# Altium PCB RF_AMPL_001.PcbDoc (part 1 of 2)
Units mm, origin at the board's own origin, x right, y up, seen from the top; angles counter-clockwise.
Board outline 150 x 92 mm, 2 copper layers (TOP, BOT), stack 1.1 mm thick; 102 components, 48 nets, 245 pads, 883 vias.
Unrouted connection lines stored in the file: 56.
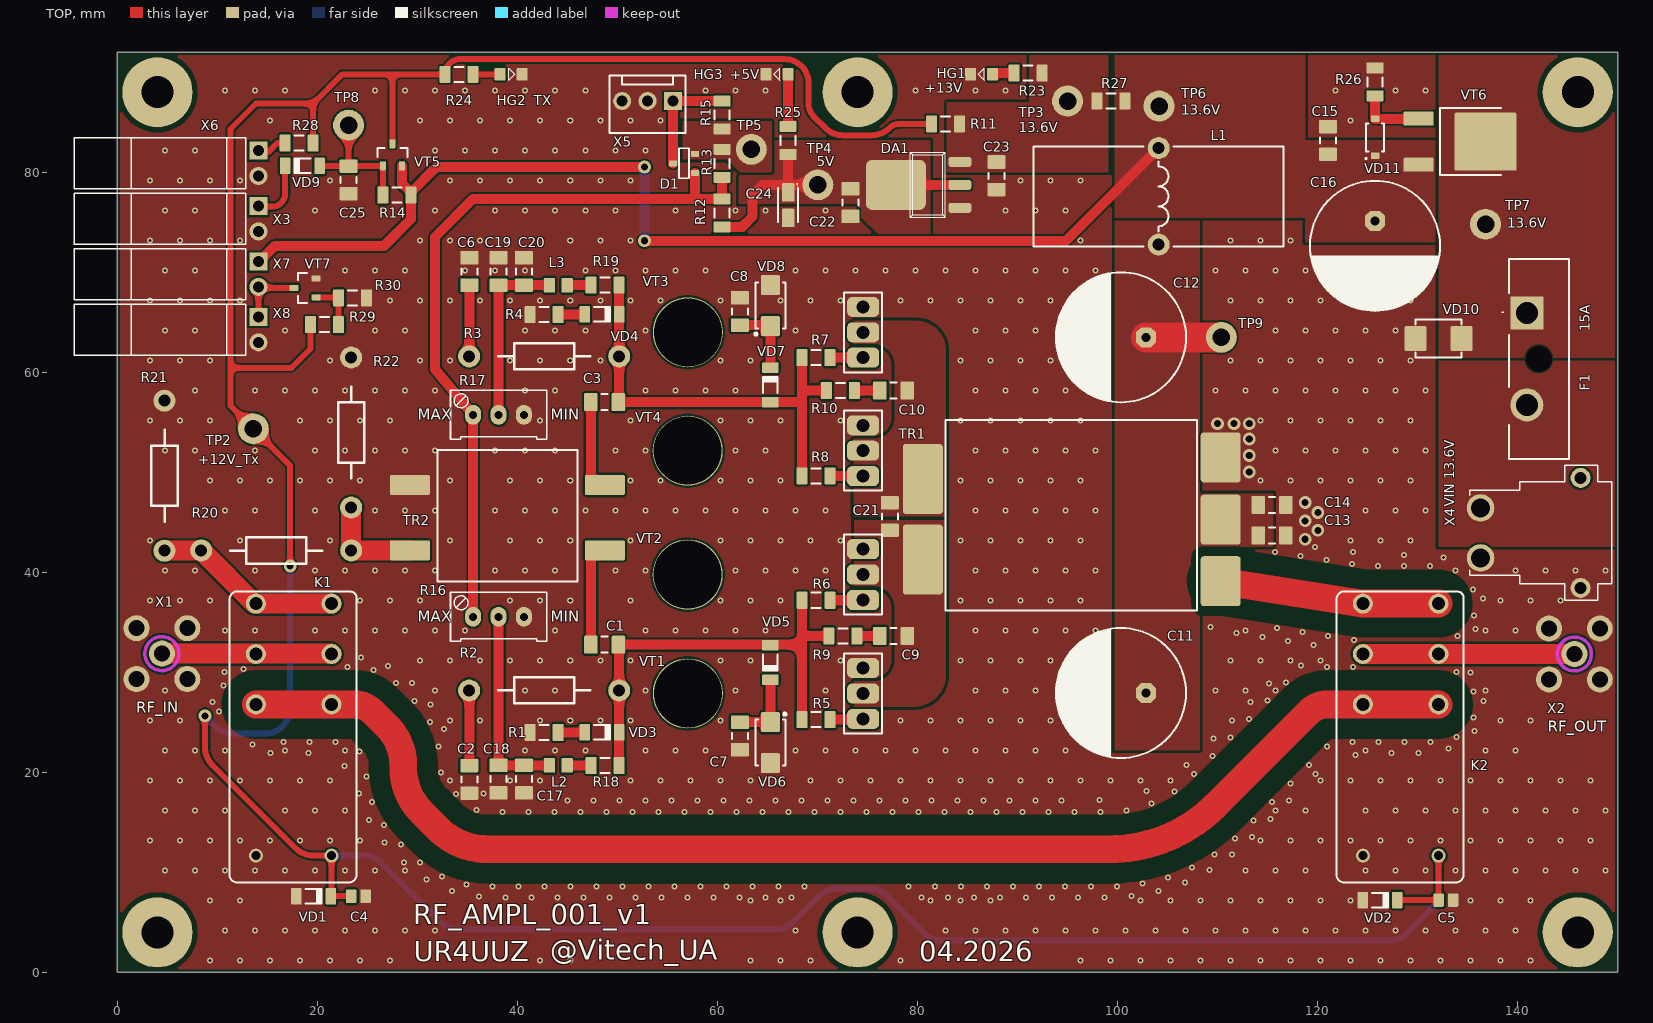
[diagram p0: TOP view]
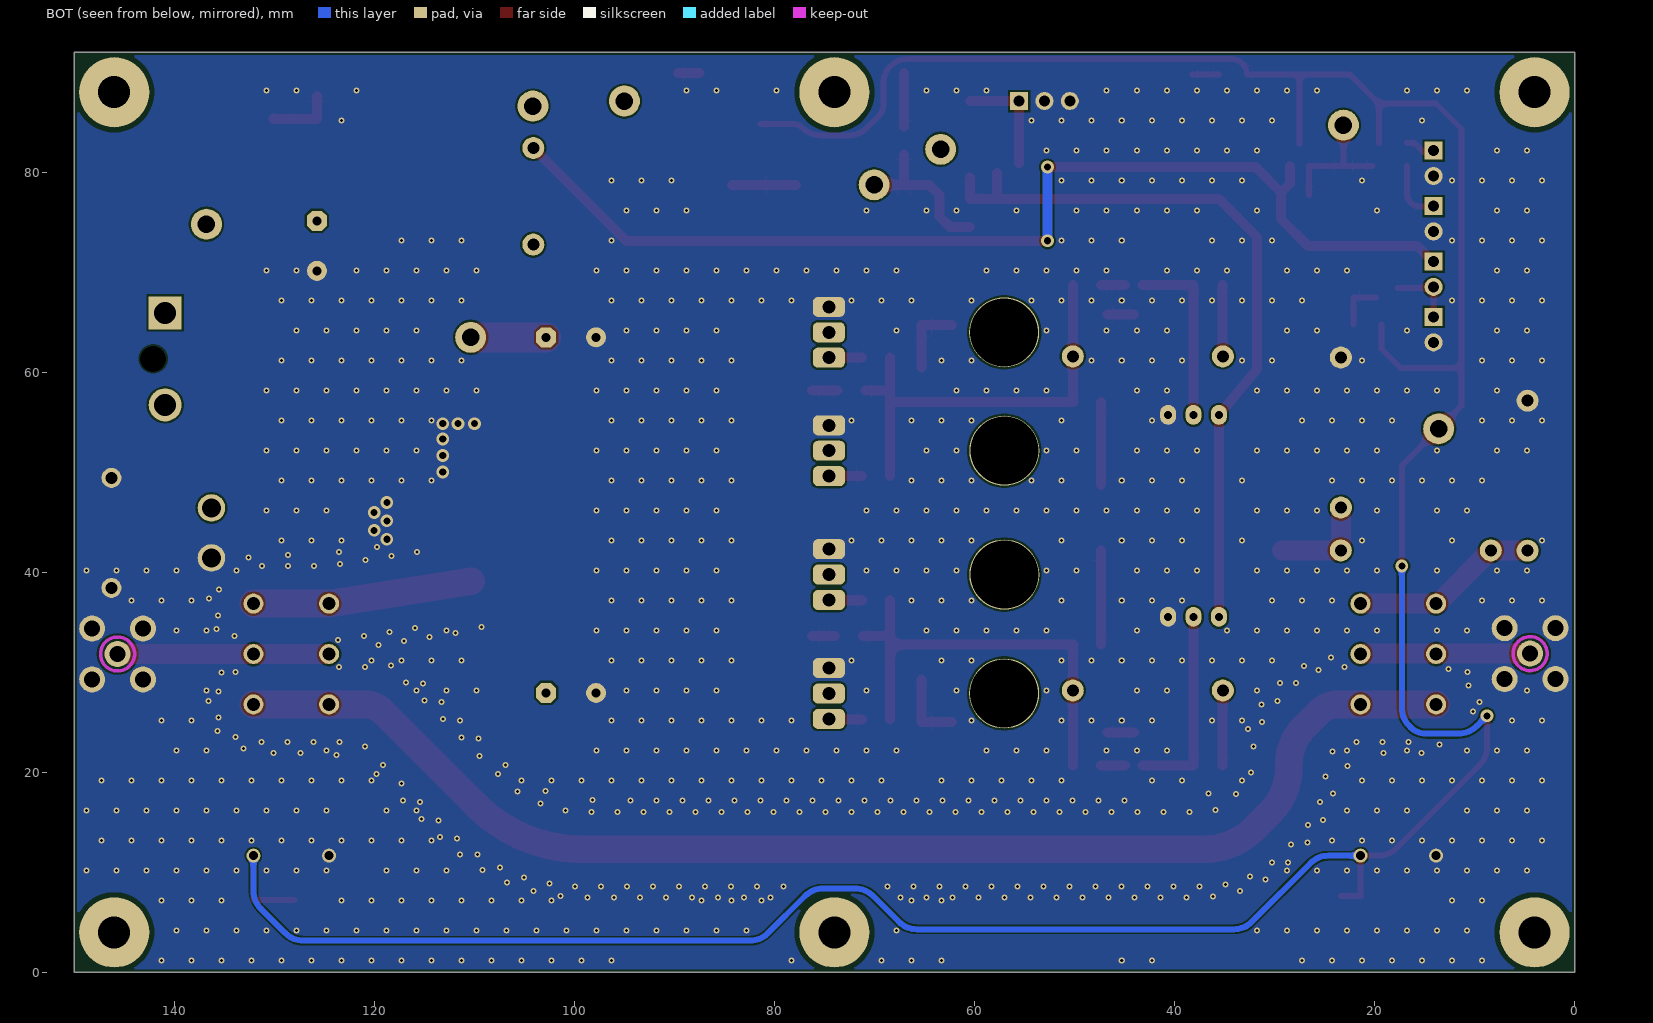
[diagram p1: BOT view, seen from below]
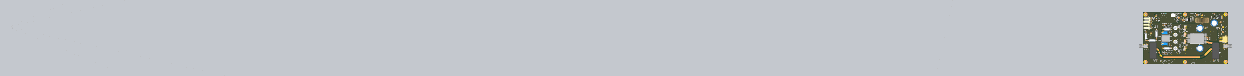
[diagram p3: 3D render of the assembled board from above, using the file's embedded part models]

## Layer stack, top to bottom
Top Solder: solder mask 0.012, Solder Resist, Dk 3.5
TOP: signal copper 0.035
Dielectric 1: core 1.03, FR-4, Dk 4.5
BOT: signal copper 0.035
Bottom Solder: solder mask 0.012, Solder Resist, Dk 3.5

## Board outline
0,0 0,92 150,92 150,0

## Design rules (kind name [scope] priority, off if disabled: settings)
BoardOutlineClearance BoardOutlineClearance_1 [OnLayer('Top Overlay')] p1: gap=0 ignorepadtopadclearanceinfootprint=FALSE
BoardOutlineClearance [All] p2: gap=0.3 ignorepadtopadclearanceinfootprint=FALSE
Clearance Clearance_CPW [InNetClass('CPW') vs OnLayer('TOP')] p1: gap=2.03 ignorepadtopadclearanceinfootprint=FALSE except(0.3: Arc-THPad Track-THPad SMDPad-SMDPad SMDPad-THPad THPad-Fill THPad-Poly THPad-Region; 1: SMDPad-Fill SMDPad-Poly SMDPad-Region)
Clearance MiddleVoltage [InNetClass('MiddleVoltage')] p2: gap=0.5 ignorepadtopadclearanceinfootprint=FALSE except(0: Arc-Hole Track-Hole SMDPad-Hole THPad-Hole Via-Hole Fill-Hole Poly-Hole Region-Hole Text-Hole; 0.2: Arc-Text Track-Text SMDPad-Text THPad-Text Via-Text Fill-Text Poly-Text Region-Text Text-Text)
Clearance HighVoltage [InNetClass('HighVoltage')] p3: gap=1 ignorepadtopadclearanceinfootprint=FALSE except(0: Arc-Hole Track-Hole SMDPad-Hole THPad-Hole Via-Hole Fill-Hole Poly-Hole Region-Hole Text-Hole; 0.2: Arc-Text Track-Text SMDPad-Text THPad-Text Via-Text Fill-Text Poly-Text Region-Text Text-Text)
Clearance Standart [All] p4: gap=0.15 ignorepadtopadclearanceinfootprint=FALSE except(0.1: THPad-Via; 0.2: Arc-Arc Arc-Track Arc-SMDPad Arc-THPad Arc-Via Arc-Fill Arc-Poly Arc-Region Track-Track Track-SMDPad Track-THPad Track-Via Track-Fill Track-Poly Track-Region SMDPad-Via SMDPad-Poly THPad-Poly Via-Poly Poly-Region Region-Region; 0.3: Arc-Hole Track-Hole Fill-Fill Fill-Poly Fill-Region Poly-Poly)
ComponentClearance [All] p1: gap=0.1 collisioncheckmode=3 verticalgap=0.1 showdistances=TRUE
Height [All] p1: minheight=0 maxheight=40 prefheight=12.7
HoleSize [All] p1: absolutevalues=TRUE maxlimit=12 minlimit=0.2 maxpercent=80.000 minpercent=20.000
HoleToHoleClearance [All] p1: gap=0.15 allowstackedmicrovias=TRUE
MinimumSolderMaskSliver [All] p1: minsoldermaskwidth=0.1
NetAntennae [All] p1: netantennaetolerance=2
PlaneClearance [All] p1: clearance=0.3
PlaneConnect PlaneConnectMiddleCurrent [InNetClass('MiddleCurrent')] p1: planeconnectstyle=Relief reliefexpansion=0.508 reliefentries=4 reliefconductorwidth=0.5 reliefairgap=0.3
PlaneConnect PlaneHighCurrent [InNetClass('HighCurrent')] p2: planeconnectstyle=Relief reliefexpansion=0.508 reliefentries=4 reliefconductorwidth=0.5 reliefairgap=0.35
PlaneConnect [All] p3: planeconnectstyle=Relief reliefexpansion=0.508 reliefentries=4 reliefconductorwidth=0.3 reliefairgap=0.3
PolygonConnect PolygonConnectMiddleCurrent [All vs InNetClass('MiddleCurrent')] p1: connectstyle=Relief reliefconductorwidth=0.4 reliefentries=4 polygonreliefangle="90 Angle" airgapwidth=0.3
PolygonConnect PolygonHighCurrent [InNetClass('HighCurrent')] p2: connectstyle=Relief reliefconductorwidth=0.5 reliefentries=4 polygonreliefangle="90 Angle" airgapwidth=0.3
PolygonConnect PolygonConnect_Keepout [(ObjectKind = 'Track') And (Layer = 'KeepOutLayer')] p3: connectstyle=Direct reliefconductorwidth=0.254 reliefentries=4 polygonreliefangle="90 Angle" airgapwidth=0.254
PolygonConnect PolygonConnect_Via [IsVia] p4: connectstyle=Direct reliefconductorwidth=0.254 reliefentries=4 polygonreliefangle="90 Angle" airgapwidth=0.254
PolygonConnect [All] p5: connectstyle=Direct reliefconductorwidth=0.6 reliefentries=4 polygonreliefangle="90 Angle" airgapwidth=0.2
RoomDefinition RF_AMPL_001 [InComponentClass('RF_AMPL_001')] p1: confinementstyle=ConfineIn formatcopy=TRUE lockcomponents=FALSE outline -797.727,-745.82 -746.927,-745.82 -746.927,-720.42 -797.727,-720.42
RoutingCorners [All] p1: cornerstyle=45-Degree minsetback=1 maxsetback=3
RoutingVias Power [InNetClass('Power')] p1: holewidth=0.8 width=1.5 viastyle="Through Hole" minholewidth=0.5 minwidth=1 maxholewidth=1.2 maxwidth=3
RoutingVias [All] p2: holewidth=0.4 width=0.8 viastyle="Through Hole" minholewidth=0.2 minwidth=0.4 maxholewidth=1 maxwidth=2
SilkToSilkClearance [All] p1: silktosilkclearance=0
SilkToSolderMaskClearance [IsVia vs IsText And OnTopSilkscreen] p1: minsilkscreentomaskgap=0.2 clearancetoexposedcopper=TRUE
SolderMaskExpansion SolderMaskExpansion_VIA [IsVia] p1: expansion=-3 istentingtop=TRUE useseparateexpansions=TRUE expansionbottom=-3 istentingbottom=TRUE
SolderMaskExpansion [All] p2: expansion=0.05 istentingtop=FALSE
SupplyNets "Schematic Supply Nets_5" [InNet('GND')] p1: voltage=0.000
SupplyNets "Schematic Supply Nets_4" [InNet('BIAS_A')] p2: voltage=0.000
SupplyNets "Schematic Supply Nets_3" [InNet('BIAS_B')] p3: voltage=0.000
SupplyNets "Schematic Supply Nets_2" [InNet('+12V_IN')] p4: voltage=0.000
SupplyNets "Schematic Supply Nets_1" [InNet('+12V_TX')] p5: voltage=0.000
SupplyNets "Schematic Supply Nets" [InNet('+5V')] p6: voltage=0.000
Width Width_CPW [InNetClass('CPW')] p1: maxlimit=2.77 minlimit=2.77 preferedwidth=2.77
Width Width_1 [All] p2: maxlimit=3 minlimit=0.2 preferedwidth=0.2
Width WidthMiddleCurrent [InNetClass('MiddleCurrent')] p3: maxlimit=2 minlimit=0.35 preferedwidth=0.5
Width WidthHighCurrent [InNetClass('HighCurrent')] p4: maxlimit=5 minlimit=0.5 preferedwidth=1
19 further rules are at their usual default settings.

## Classes and differential pairs
net class CPW: NetK1_3 NetK2_7

## Components (designator, comment, footprint, x,y, rotation, side; value= is the part's Value field where it differs from the comment)
C1 "0.1" C_CERAMIC_1206_MED 48.717,32.766 r0 top
C2 "0.1" C_CERAMIC_1206_MED 35.179,19.304 r90 top
C3 "0.1" C_CERAMIC_1206_MED 48.717,57.023 r0 top
C4 "18pF" C_CERAMIC_0805_HI 24.093,7.62 r180 top value=0.1мкФ
C5 "18pF" C_CERAMIC_0805_HI 132.805,7.239 r180 top value=0.1мкФ
C6 "0.1" C_CERAMIC_1206_MED 35.179,70.082 r270 top
C7 "0.1" C_CERAMIC_1206_MED 62.23,23.644 r90 top
C8 "0.1" C_CERAMIC_1206_MED 62.23,66.092 r270 top
C9 "0.1" C_CERAMIC_1206_MED 77.597,33.655 r180 top value=4700
C10 "0.1" C_CERAMIC_1206_MED 77.597,58.166 r180 top value=4700
C11 "Aluminium capacitor, 2200мкФ, 25V, ±20%, 54mOhm, 14x10x5 mm, -55...+105°C" "CAP: D13C5H20" 100.33,27.94 r180 top value=2200мкФ
C12 "Aluminium capacitor, 2200мкФ, 25V, ±20%, 54mOhm, 14x10x5 mm, -55...+105°C" "CAP: D13C5H20" 100.33,63.5 r180 top value=2200мкФ
C13 "0.1" C_CERAMIC_1206_MED 115.421,43.688 r180 top
C14 "0.1" C_CERAMIC_1206_MED 115.421,46.736 r180 top
C15 "0.1" C_CERAMIC_1206_MED 121.031,83.185 r270 top
C16 "Aluminium capacitor, 2200мкФ, 25V, ±20%, 54mOhm, 14x10x5 mm, -55...+105°C" "CAP: D13C5H20" 125.73,72.644 r270 top value=2200мкФ
C17 "100" C_CERAMIC_1206_MED 40.64,19.326 r270 top
C18 "0.1" C_CERAMIC_1206_MED 38.1,19.326 r270 top
C19 "100" C_CERAMIC_1206_MED 38.1,70.082 r90 top
C20 "0.1" C_CERAMIC_1206_MED 40.64,70.082 r90 top
C21 "100" C_CERAMIC_1206_MED 77.216,45.593 r270 top
C22 "0.1" C_CERAMIC_1206_MED 73.279,76.962 r270 top
C23 "0.1" C_CERAMIC_1206_MED 87.884,79.651 r270 top
C24 "10uF" C_TANTAL_CASE_A_MED 67.056,76.703 r270 top
C25 "0.1" C_CERAMIC_1206_MED 23.114,79.248 r270 top
D1 "Part Number" SOT23-3_300X250X110 56.642,80.899 r180 top
DA1 "LD1117S50TR" SOT-223 81.026,78.74 r90 top
F1 "STANDART_FUSE_HOLDER" 17861640001 140.913,65.941 r270 top
HG1 "LTST-C171GKT" LTST-C171GKT 86.403,89.789 r180 top
HG2 "LTST-C171GKT" LTST-C171GKT 39.37,89.789 r0 top
HG3 "LTST-C171GKT" LTST-C171GKT 65.956,89.789 r180 top
K1 "HF115F/012-2ZS4" HF115Fxxx-1(2)Zx3(4) 17.623,24.277 r90 top
K2 "HF115F/012-2ZS4" HF115Fxxx-1(2)Zx3(4) 128.3,24.277 r90 top
L1 "Fixed inductor, 10μH, ±20%, R22.9/14/7.62, Kool Mu, µ=125, 90 нГн/витков2" "IND: R22.9/14/7.62 (H)" 104.085,77.597 r270 top value=10μH
L2 "1uH" LQM21PNxxxxGRx_MED 44.073,20.701 r180 top
L3 "1uH" LQM21PNxxxxGRx_MED 44.073,68.707 r180 top
R1 "1кОм" R_ANY_CHIP_1206_MED 42.669,24.003 r180 top
R2 "27" FKN2WS-Series 42.665,28.194 r180 top
R3 "27" FKN2WS-Series 42.665,61.595 r180 top
R4 "1кОм" R_ANY_CHIP_1206_MED 42.669,65.786 r180 top
R5 "2.2" R_ANY_CHIP_1206_MED 69.847,25.273 r0 top
R6 "2.2" R_ANY_CHIP_1206_MED 69.847,37.211 r0 top
R7 "2.2" R_ANY_CHIP_1206_MED 69.847,61.468 r0 top
R8 "2.2" R_ANY_CHIP_1206_MED 69.847,49.657 r0 top
R9 "750" R_ANY_CHIP_1206_MED 72.517,33.655 r0 top
R10 "750" R_ANY_CHIP_1206_MED 72.273,58.181 r0 top
R11 "NF" R_ANY_CHIP_1206_MED 82.801,84.836 r180 top
R12 "10k" R_ANY_CHIP_1206_MED 60.452,75.943 r90 top
R13 "10k" R_ANY_CHIP_1206_MED 60.452,80.899 r270 top
R14 "10k" R_ANY_CHIP_1206_MED 27.943,77.724 r0 top
R15 "10k" R_ANY_CHIP_1206_MED 60.452,85.728 r270 top
R16 "10k" 3296W-1-xxx 38.1,35.56 r270 top
R17 "10k" 3296W-1-xxx 38.1,55.753 r270 top
R18 "15" R_ANY_CHIP_1206_MED 48.765,20.701 r0 top
R19 "15" R_ANY_CHIP_1206_MED 48.765,68.707 r0 top
R20 "68" FKN2WS-Series 15.875,42.196 r0 top
R21 "100" FKN2WS-Series 4.699,49.664 r90 top
R22 "100" FKN2WS-Series 23.368,53.982 r90 top
R23 "750" R_ANY_CHIP_1206_MED 91.059,89.916 r0 top
R24 "750" R_ANY_CHIP_1206_MED 34.16,89.789 r0 top
R25 "750" R_ANY_CHIP_1206_MED 67.056,83.188 r270 top
R26 "1кОм" R_ANY_CHIP_1206_MED 125.73,89.03 r90 top
R27 "0" R_ANY_CHIP_1206_MED 99.314,87.122 r180 top
R28 "750" R_ANY_CHIP_1206_MED 18.164,82.931 r180 top
R29 "750" R_ANY_CHIP_1206_MED 20.698,64.77 r0 top
R30 "10k" R_ANY_CHIP_1206_MED 23.498,67.437 r180 top
TP2 "PAD-1.75mm" PAD-1.75mm 13.589,54.356 r0 top
TP3 "PAD-1.75mm" PAD-1.75mm 94.996,87.122 r0 top
TP4 "PAD-1.75mm" PAD-1.75mm 70.026,78.74 r0 top
TP5 "PAD-1.75mm" PAD-1.75mm 63.373,82.296 r0 top
TP6 "PAD-1.75mm" PAD-1.75mm 104.14,86.614 r0 top
TP7 "PAD-1.75mm" PAD-1.75mm 136.779,74.803 r0 top
TP8 "PAD-1.75mm" PAD-1.75mm 23.114,84.709 r0 top
TP9 "PAD-1.75mm" PAD-1.75mm 110.363,63.5 r0 top
TR1 "TR" AMIDON_43-3312 95.348,45.307 r0 top
TR2 "TR" AMIDON_43-202 38.989,45.466 r0 top
VD1 "LL4148" SOD-80C_MED 19.611,7.62 r180 top
VD2 "LL4148" SOD-80C_MED 126.238,7.239 r180 top
VD3 "LL4148" SOD-80C_MED 48.44,24.003 r180 top
VD4 "LL4148" SOD-80C_MED 48.44,65.786 r180 top
VD5 "LL4148" SOD-80C_MED 65.278,30.988 r90 top
VD6 "SMAJ15CA" SMA_MED 65.278,22.969 r270 top
VD7 "LL4148" SOD-80C_MED 65.278,58.748 r270 top
VD8 "SMAJ15CA" SMA_MED 65.278,66.675 r90 top
VD9 "LL4148" SOD-80C_MED 18.489,80.645 r0 top
VD10 "SM6T18A" SMB-Bi1_MED 132.08,63.373 r0 top
VD11 "MMSZ5248BT1G" SOD-123_MED 125.73,83.494 r90 top
VT1 "IRLZ24N" TO220(H) 74.556,27.889 r90 top locked
VT2 "IRLZ24N" TO220(H) 74.549,39.78 r90 top locked
VT3 "IRLZ24N" TO220(H) 74.556,64 r90 top locked
VT4 "IRLZ24N" TO220(H) 74.549,52.159 r90 top locked
VT5 "BC807-40" SOT-23_MED 27.493,81.745 r270 top
VT6 "AOD403" DPAK_REC 135.279,83.058 r270 top
VT7 "IRLML0100TR" SOT-23_MED 18.753,68.453 r0 top
X1 "WSD-SMAKWE-14.5" KLS1-SMA002 4.445,31.877 r0 top
X2 "WSD-SMAKWE-14.5" KLS1-SMA002 145.669,31.837 r180 top
X3 "WH-02R" WF-2R 14.097,75.353 r90 top
X4 "XT30PW-M" XT30PW-M 144.78,43.942 r180 top
X5 "WH-03S" WF-3S 55.542,87.122 r180 top
X6 "WH-02R" WF-2R 14.097,80.899 r90 top
X7 "WH-02R" WF-2R 14.097,69.808 r90 top
X8 "WH-02R" WF-2R 14.097,64.262 r90 top

## Footprints (in the part's own frame and the unit in brackets; to place one, negate y for a bottom-side part, rotate by r counter-clockwise, add the part's x,y. Pads: shape width x height; smd on the part's side, far side on the other; paste and mask are expansions set on the pad)
3296W-1-xxx [mm] "Square Trimpot Trimming Potentiometer"
  oval 2x1.6 hole 0.8 mask+0.05: 1(0,-2.54) 2(0,0) 3(0,2.54)
  silkscreen extent -2.45,-4.8 2.45,4.8, body extent -2.45,-4.76 2.38,4.76, height 11.6
17861640001 [mm] "Automotive Fuse holder THT-Mount"
  rect 3.3x3.3 hole 2.2: 1(0,0)
  round 3.3 hole 2.2: 2(9.2,0)
  round 1.3 hole 2.6 unplated: MH1(4.6,1.2)
  silkscreen extent -5.4,-2.51 14.6,4.2, body extent -5.51,-1.78 14.64,4.22, height 17.65
AMIDON_43-202 [mm]
  rrect15% 4x2 smd mask+0.05: 1(-9.75,3.27) 2(9.75,3.27) 3(-9.75,-3.27) 4(9.75,-3.27)
  silkscreen extent -6.99,-6.38 6.98,6.76, body extent -7,-6.35 7,6.75, height 7.75
AMIDON_43-3312 [mm]
  rrect15% 4x5 smd mask+0.05: 1(14.957,6.188) 2(14.957,-6.191) 4(14.957,-0.04)
  rrect15% 4x7 smd mask+0.05: 3(-14.83,-4.032) 5(-14.83,4.032)
  silkscreen extent -12.57,-9.14 12.57,9.91, body extent -12.63,-9.12 12.57,9.88, height 9.75
C_CERAMIC_0805_HI [mm] "Chip Capacitor, 2-Leads, Body 2,00x1,25mm, IPC High Density"
  rrect15% 1.05x1.35 smd mask+0.05: 1(-0.725,0) 2(0.725,0)
  TOP pour cut-out: -0.05,0.65 0.05,0.65 0.05,-0.65 -0.05,-0.65
  body extent -1.1,-0.72 1.1,0.73, height 1.35
C_CERAMIC_1206_MED [mm] "Chip Capacitor, 2-Leads, Body 3,20x1,60mm, IPC Medium Density"
  rrect15% 1.35x1.8 smd mask+0.05: 1(-1.375,0) 2(1.375,0)
  silkscreen extent -0.3,-0.8 0.3,0.8, body extent -1.7,-0.9 1.7,0.9, height 1.8
C_TANTAL_CASE_A_MED [mm] "Molded Capacitor, 2-Leads, Body 3,20x1,60mm, IPC Medium Density"
  rrect15% 1.85x1.25 smd: 1(-1.275,0) 2(1.275,0)
  silkscreen extent -2.15,-1 1.7,1, body extent -1.92,-0.9 1.92,0.9, height 1.8
"CAP: D13C5H20" [mm]
  oct 2x2 hole 0.9: 1(-2.5,0)
  round 2 hole 0.9: 2(2.5,0)
  silkscreen extent -6.5,-6.5 6.5,6.5, body extent -6.5,-6.5 6.5,6.5, height 25
DPAK_REC [mm]
  rrect15% 1.4x3 smd mask+0.05: 1(-2.3,-5.2) 3(2.3,-5.2)
  rrect5% 5.8x6.2 smd paste-3.1 mask+0.05: 2(0,1.5)
  silkscreen extent -3.35,-3.05 3.35,3.05, body extent -3.35,-5.85 3.35,4.25, height 2.4
FKN2WS-Series [mm]
  round 2.2 hole 1.2 mask+0.05: 1(-7.5,0) 2(7.5,0)
  silkscreen extent -4.59,-1.33 4.59,1.3, body extent -7.9,-2.55 7.9,2.55, height 4.85
HF115Fxxx-1(2)Zx3(4) [mm] "Miniature High Power Relay"
  round 1.4 hole 0.9: 1(-12.6,3.78) 2(-12.6,-3.78)
  round 2 hole 1.3: 3(2.52,3.78) 4(2.52,-3.78) 5(7.56,3.78) 6(7.56,-3.78) 7(12.6,3.78) 8(12.6,-3.78)
  silkscreen extent -15.29,-6.3 13.82,6.41, body extent -15.17,-6.35 13.83,6.35, height 15.7
"IND: R22.9/14/7.62 (H)" [mm]
  round 2.2 hole 1.2: 1(-4.83,0.015) 2(4.83,0.015)
  silkscreen extent -5,-12.5 5,12.5, body extent -4.83,-12.47 4.83,12.47, height 24.77
KLS1-SMA002 [mm] "SMA Connector, Right Angle"
  round 2.6 hole 1.6 mask+0.05: 1(0,0) 2(-2.54,-2.54) 2(-2.54,2.54) 2(2.54,-2.54) 2(2.54,2.54)
  TOP pour cut-out: -1.9,0 -1.755,-0.727 -1.344,-1.344 -0.727,-1.755 0,-1.9 0,-1.9 0.727,-1.755 1.344,-1.344 1.755,-0.727 1.9,0 1.9,0 1.755,0.727 1.344,1.344 0.727,1.755 0,1.9 0,1.9 -0.727,1.755 -1.344,1.344 -1.755,0.727 -1.9,0
  TOP keep-out circle w0.35: c0,0 r1.7
  BOT pour cut-out: -1.9,0 -1.755,-0.727 -1.344,-1.344 -0.727,-1.755 0,-1.9 0,-1.9 0.727,-1.755 1.344,-1.344 1.755,-0.727 1.9,0 1.9,0 1.755,0.727 1.344,1.344 0.727,1.755 0,1.9 0,1.9 -0.727,1.755 -1.344,1.344 -1.755,0.727 -1.9,0
  BOT keep-out circle w0.35: c0,0 r1.7
  body extent -11.58,-3.2 3.28,3.15, height 9.57
LQM21PNxxxxGRx_MED [mm] "Chip Inductor, 2-Leads, Body 2,00x1,25mm, IPC Medium Density"
  rrect15% 1.13x1.47 smd: 1(-0.885,0) 2(0.885,0)
  body extent -1.07,-0.7 1.08,0.7, height 1
LTST-C171GKT [mm]
  rrect15% 1.1x1.25 smd mask+0.05: AN(-1.1,0) CA(1.1,0)
  silkscreen extent -0.25,-0.6 0.35,0.6, body extent -1.05,-0.67 1.05,0.68, height 0.9
PAD-1.75mm [mm]
  round 3.1 hole 1.75: 1(0,0)
R_ANY_CHIP_1206_MED [mm] "Chip Resistor, 2-Leads, Body 3,10x1,60mm, IPC Medium Density"
  rrect15% 1.1x1.7 smd: 1(-1.4,0) 2(1.4,0)
  silkscreen extent -0.45,-0.75 0.45,0.75, body extent -1.6,-0.85 1.6,0.85, height 0.65
SMA_MED [mm] "Molded Diode, 2-Leads, Body 4,30x2,61mm, IPC Medium Density"
  rrect15% 2x1.9 smd mask+0.05: AN(2.05,0) CA(-2.05,0)
  silkscreen extent -2.97,-1.5 2.3,1.58, body extent -2.52,-1.46 2.52,1.46, height 2.44
SMB-Bi1_MED [mm] "Molded Diode, 2-Leads, Body 5,60x3,95mm, IPC Medium Density"
  rrect15% 2.2x2.5 smd mask+0.05: AN1(-2.3,0) AN2(2.3,0)
  silkscreen extent -2.3,-1.9 2.3,1.9, body extent -2.8,-1.95 2.8,1.95, height 2.65
SOD-80C_MED [mm] "MELF Diode, 2-Leads, Body 3,50x1,45mm, IPC Medium Density"
  rrect15% 1.05x1.65 smd mask+0.05: AN(1.725,0) CA(-1.725,0)
  silkscreen extent -0.8,-0.73 0.8,0.72, body extent -1.75,-0.72 1.75,0.72, height 1.45
SOD-123_MED [mm] "SOD-123, 2-Leads, Body 1,60x3,71mm, IPC Medium Density"
  rrect15% 0.65x0.85 smd mask+0.05: AN(1.85,0) CA(-1.85,0)
  silkscreen extent -2.2,-0.9 1.4,0.97, body extent -1.95,-0.9 1.95,0.9, height 1.18
SOT23-3_300X250X110 [mm] "SOT23, 3-Leads, Body 2,90x2,45mm, Pitch 0,90mm, IPC Low Density"
  rrect30% 0.8x0.6 smd paste-0.05 mask+0.05: 1(-1.1,0.95) 2(-1.1,-0.95) 3(1.1,0)
  silkscreen extent -0.5,-1.5 0.5,1.5, body extent -1.25,-1.5 1.25,1.5, height 1.1
SOT-23_MED [mm] "SOT23, 3-Leads, Body 2,92x2,37mm, Pitch 0,95mm, IPC Medium Density"
  rrect15% 0.9x0.6 smd mask+0.05: 1(1.1,-0.95) 2(1.1,0.95) 3(-1.1,0)
  silkscreen extent -0.7,-1.5 0.2,1.5, body extent -1.25,-1.5 1.25,1.5, height 1.1
SOT-223 [mm]
  rrect50% 1x2.3 smd mask+0.05: 1(-2.3,-3.2) 2(0,-3.2) 3(2.3,-3.2)
  rrect25% 5x6 smd mask+0.05: 4(0,3.2)
  silkscreen extent -3.22,-1.75 3.28,1.75, body extent -3.25,-3.48 3.25,3.48, height 1.68
TO220(H) [mm]
  rrect50% 2x3.2 hole 1.3: 1(-2.54,0) 2(0,0) 3(2.54,0)
  silkscreen extent -4,-1.9 4,1.9, body extent -4.95,-0.37 4.95,20.67, height 2.76
WF-2R [mm]
  rect 1.8x1.8 hole 1.1: 1(1.27,0)
  round 1.8 hole 1.1: 2(-1.27,0)
  silkscreen extent -2.54,1.27 2.54,18.41, body extent -2.54,-0.33 2.54,13.5, height 5.8
WF-3S [mm] "Connector; Header; 3 Position"
  rect 1.8x1.8 hole 1.1: 1(0,0)
  round 1.8 hole 1.1: 2(2.54,0) 3(5.08,0)
  silkscreen extent -1.27,-2.54 6.35,3.2, body extent -1.25,-2.6 6.25,3.2, height 11.62
XT30PW-M [mm]
  round 2.75 hole 1.9: 1(8.5,2.5) 2(8.5,-2.5)
  round 2 hole 1.2: MP(-1.5,5.5) MP(-1.5,-5.5)
  silkscreen extent -4.6,-6.75 9.6,6.75, body extent -4.5,-6.65 9.45,6.65, height 5.05

## Part data
C1 C3 C17 C18 C19 C20 C21 C25: library part 1206B102K102CG, "1nF 1000V X7R ±10% 1206 Ceramic Capacitor RoHS", Dielectric Type=X7R, Manufacturer=Walsin, Package=1206, Supplier Part Number 1=791-1206B102K102CT, Temperature Range="-55°C ~ 125°C", Tolerance=±10%, Voltage=1000V, Component Status=Released, Component Type=SMD, ComponentLink1Description=Datasheet, ComponentLink1URL=https://eu.mouser.com/datasheet/2/210/Middle_and_High_Voltage_DS-1535659.pdf, Part Number=1206B102K102CG, Part Type="Ceramic / X7R / 1206", Price=0, Replacement=NONE, Standard Lead Time="31 Weeks", Supplier 1=Mouser
C2 C6 C7 C8 C13 C14 C15 C22 C23: library part 1206B102K102CG, "1nF 1000V X7R ±10% 1206 Ceramic Capacitor RoHS", Dielectric Type=X7R, Manufacturer=Walsin, Package=1206, Supplier Part Number 1=791-1206B102K102CT, Temperature Range="-55°C ~ 125°C", Tolerance=±10%, Voltage=100V, Component Status=Released, Component Type=SMD, ComponentLink1Description=Datasheet, ComponentLink1URL=https://eu.mouser.com/datasheet/2/210/Middle_and_High_Voltage_DS-1535659.pdf, Part Number=1206B102K102CG, Part Type="Ceramic / X7R / 1206", Price=0, Replacement=NONE, Standard Lead Time="31 Weeks", Supplier 1=Mouser
C4 C5: library part CERAMIC_0805, Dielectric Type=C0G/NP0, Manufacturer=Hitano, Package=0805, Part Number=**, Temperature Range="-55°C ~ 125°C", Tolerance=±5%, Voltage=50V, Component Status=Released, Component Type=SMD, ComponentLink1Description=Datasheet, ComponentLink1URL=\\altiumdb.ajax.local\files\Datasheet\Capacitor\Hitano-MLCC.pdf, GUID_1C=32087c8a-96b8-11ea-ab61-0050569f2651, Part Type="Ceramic / C0G(NP0) / 0402", Price=0, Replacement=NONE
C9 C10: library part 1206B102K102CG, "1nF 1000V X7R ±10% 1206 Ceramic Capacitor RoHS", Dielectric Type=X7R, Manufacturer=Walsin, Package=1206, Part Number=12065A472JAT2A, Supplier Part Number 1=791-1206B102K102CT, Temperature Range="-55°C ~ 125°C", Tolerance=±10%, Voltage=50V, Component Status=Released, Component Type=SMD, ComponentLink1Description=Datasheet, ComponentLink1URL=https://eu.mouser.com/datasheet/2/210/Middle_and_High_Voltage_DS-1535659.pdf, Part Type="Ceramic / X7R / 1206", Price=0, Replacement=NONE, Standard Lead Time="31 Weeks", Supplier 1=Mouser
C11 C12 C16: library part Aluminium, Manufacturer=Wurth, Package="14x10x5 mm", PartNumber=860080475013, Temperature=-55...+105°C, Tolerance=±20%, TypeCapacitor="Aluminium capacitor", Voltage=25V, HelpURL=https://www.digikey.com/product-detail/en/wurth-electronics-inc/860080475013/732-9029-1-ND/5728972, Impedance=54mOhm, ValueManufacturerPartNumber="Aluminium capacitor, 2200мкФ, 25V, ±20%, 54mOhm, 14x10x5 mm, -55...+105°C"
C24: library part 293D106X9010A2TE3, "10uF 10V ±10% Case A Tantalum Capacitor RoHS, 3.4Ohm", Dielectric Type=NONE, Manufacturer=Vishay, Package="Case A", Supplier Part Number 1=74-293D106X9010A2TE3, Temperature Range="-55°C ~ 125°C", Tolerance=±10%, Voltage=10V, Component Status=Released, Component Type=SMD, ComponentLink1Description=Datasheet, ComponentLink1URL=https://eu.mouser.com/datasheet/2/427/293d-1763499.pdf, Part Number=293D106X9010A2TE3, Part Type=Tantalum, Price=0.2178, Replacement=NONE, Standard Lead Time="20 Weeks", Supplier 1=Mouser
D1: library part TL431IDBZ, "Precision Programmable Reference SOT23-3", Manufacturer="Texas Instruments", Max Operating Temperature=+85°C, Min Operating Temperature=-40°C, Package=SOT23-3, Component Function="Voltage Reference", ComponentLink1Description="Datasheet Link", Mount=SMT, Name="TL431IDBZ [Texas Instruments]", Number of Pins=4, Part Number=TL431IDBZ, Type=Мікросхема
DA1: "Adjustable and fixed low drop positive voltage regulator, 5V 800mA, 1.25V to 15V Vin", Manufacturer=STMicroelectronics, Package=SOT-223, Supplier Part Number 1=497-6447-2-ND, Temperature Range="0°C ~ 125°C", Component Status=Released, Component Type=SMD, ComponentLink1Description=Datasheet, ComponentLink1URL=https://www.st.com/content/ccc/resource/technical/document/datasheet/99/3b/7d/91/91/51/4b/be/CD00000544.pdf/files/CD00000544.pdf/jcr:content/translations/en.CD00000544.pdf, Part Number=LD1117S50TR, Part Type="Power / Linear Regulator", Price=0.66, Replacement=NONE, Standard Lead Time="14 Weeks", Supplier 1=Digi-Key
F1: "Automotive Fuse holder THT-Mount", Current=15A, Manufacturer_Name=LITTELFUSE, Manufacturer_Part_Number=17861640001, Datasheet Link=https://www.littelfuse.com/media?resourcetype=2d-prints&itemid=dcb90cf3-0771-4ccd-8726-26101cf00574&filename=ol-178.6164.0000(c), Height=17.5mm
HG1 HG2 HG3: "Low Power LED, Green 565nm, Clear, SMD 0805, Vf 2.1V - 2.6V, 5 ~ 12mcd @ 20 mA, 130°", Color=Green, Manufacturer="Lite-On Optoelectronics", Package=0805, Supplier Part Number 1=160-1423-2-ND, Temperature Range="-55°C ~ 85°C", Component Status=Released, Component Type=SMD, ComponentLink1Description=Datasheet, GUID_1C=df39881f-c399-11eb-ab74-0050569f2651, Part Number=LTST-C171GKT, Part Type="LED / 0805", Price=0.06, Replacement=NONE, Supplier 1=Digi-Key, Wavelength=565nm
K1 K2: "Miniature High Power Relay, DPDT (2 Form C), 12VDC 400mW Coil, 5.0mm 2 Pole 8A AgCdO", Manufacturer=Hongfa, Temperature Range="-40°C ~ 85°C", Ajax_1C_ID=38428, Ajax_1C_PN="HF115F/012-2ZS4 HONGFA, Реле", Ajax_1С_Status="RND Only", Component Status=Released, Component Type=PTH, ComponentLink1Description=Datasheet, ComponentLink1URL=https://www.tme.eu/Document/2962d862af219292e2e76bbc4b5ef3a2/hf115f.pdf, GUID_1C=4ba44618-64be-11ec-a90c-00505699469b, Part Number=HF115F/012-2ZS4, Part Type=Relay, Price=2.27649268, Replacement=NONE, Supplier 1=TME, Supplier Part Number 1=HF115F/012-2ZS4
L1: library part Inductor_R22.9/14/7.62, Manufacturer=Magnetics, Package=R22.9/14/7.62, PartNumber=0077310A7, Tolerance=±20%, TypeInductor="Fixed inductor", ValueManufacturerPartNumber="Fixed inductor, 10μH, ±20%, R22.9/14/7.62, Kool Mu, µ=125, 90 нГн/витков2", AL="90 нГн/витков2", HelpURL=http://ferrite.ru/warehouse/r-22-9147-62-77310-a7.html, MaterialPermeability=µ=125, TypeMatiriel="Kool Mu"
L2 L3: library part LQM21PN1R0MGHL, "1uH Shielded Multilayer Inductor 1.7A 100mOhm Max, 0805", Current=1.7A, Manufacturer="Murata Electronics", Package=0805, Saturation Current=1.5A, Supplier Part Number 1=81-LQM21PN1R0MGHL, Temperature Range="-40°C ~ 85°C", Tolerance=±20%, Component Status=Released, Component Type=SMD, ComponentLink1Description=Datasheet, ComponentLink1URL=https://eu.mouser.com/datasheet/2/281/1/JELF243B_0040-1699501.pdf, Part Number=LQM21PN1R0MGHL, Part Type="Power / Multilayer", Price=NONE, Replacement=NONE, Standard Lead Time="10 Weeks", Supplier 1=Mouser
R1 R4 R9 R10 R18 R19 R23 R24 R25 R26 R28 R29: library part RC1206FR-071RL, "1 Ohms ±1%, 1/4W 1206 Thick Film Resistor", Manufacturer=Yageo, Package=1206, Power Rating=0.25W, Supplier Part Number 1=311-1.00FRTR-ND, Temperature Range="-55°C ~ 155°C", Temperature Stability=±200ppm/°C, Tolerance=±1%, Voltage=200V, Ajax_1C_ID=11059, Ajax_1C_PN="1R 1% 1206 Resistors SMD RoHS", Ajax_1С_Status="RND Only", Component Status=Released, Component Type=SMD, ComponentLink1Description=Datasheet, ComponentLink1URL=https://eu.mouser.com/datasheet/2/447/PYu_RC_Group_51_RoHS_L_11-1984063.pdf, GUID_1C=50ee7b76-bfc7-11e7-8199-14dda9d2d04d, Part Number=RC1206FR-071RL, Part Type="Thick Film", Price=0,0027, Replacement=NONE, Supplier 1=Digi-Key
R2 R3: library part FKN2WSJT-73-22R, "22 Ohm ±5%, 2W d4.6mm L11.5mm Axial Through Hole, Fusible, Flameproof, Wirewound Resistor", Manufacturer=Yageo, Package="Axial 4.6mm, L11.5mm", Power Rating=2W, Supplier Part Number 1=603-FKN2WSJT-73-22R, Temperature Range="-40°C ~ 155°C", Temperature Stability=±350ppm/°C, Tolerance=±5%, Ajax_1C_ID=55873, Ajax_1C_PN="22R 5% 2W FKN2WSJT-73-22R YAGEO резистор выводной", Ajax_1С_Status="RND Only", Component Status=Released, Component Type=PTH, ComponentLink1Description=Datasheet, ComponentLink1URL=https://www.yageo.com/upload/media/product/productsearch/datasheet/lr/YAGEO%20FKN_datasheet_2021v0.pdf, GUID_1C=1e7de5d6-6f01-11ed-a366-005056994834, Part Number=FKN2WSJT-73-22R, Part Type=Wirewound, Price=0,2524, Replacement=NONE, Supplier 1=Mouser
R5 R6 R7 R8: library part RC1206FR-072R4L, "2.42Ohms ±1%, 1/4W 1206 Thick Film Resistor", Manufacturer=Yageo, Package=1206, Power Rating=0.25W, Supplier Part Number 1=603-RC1206FR-072R4L, Temperature Range="-55°C ~ 155°C", Temperature Stability=±200ppm/°C, Tolerance=±1%, Voltage=200V, Ajax_1C_ID=17368, Ajax_1C_PN="2.4R 1% 1206 1/4W Resistors SMD RoHS", Ajax_1С_Status="Mass Production", Component Status=Released, Component Type=SMD, ComponentLink1Description=Datasheet, ComponentLink1URL=https://eu.mouser.com/datasheet/2/447/Yageo_03_18_2021_PYu_RC_Group_51_RoHS_L_11-2199992.pdf, GUID_1C=fdd97e3f-df6d-11e9-ab58-0050569f2651, Part Number=RC1206FR-072R4L, Part Type="Thick Film", Price=0,0021, Replacement=NONE, Supplier 1=Mouser
R11 R27: library part RC1206JR-070RL, "0 Ohms Jumper, 1/4W 1206 Thick Film Resistor", Manufacturer=Yageo, Package=1206, Power Rating=0.25W, Supplier Part Number 1=311-0.0ERTR-ND, Temperature Range="-55°C ~ 155°C", Temperature Stability=NONE, Tolerance=±5%, Voltage=200V, Ajax_1C_ID=5515, Ajax_1C_PN="0R 5% 1206 Resistors SMD RoHS", Ajax_1С_Status="Mass Production", Component Status=Released, Component Type=SMD, ComponentLink1Description=Datasheet, ComponentLink1URL=https://eu.mouser.com/datasheet/2/447/PYu_RC_Group_51_RoHS_L_10-1664068.pdf, GUID_1C=96b6e750-6b2e-11e4-9c1d-a45d36c4a9e5, Part Number=RC1206JR-070RL, Part Type="Thick Film", Price=0,0018, Replacement=NONE, Supplier 1=Digi-Key
R12 R13 R14 R15 R30: library part RC1206JR-0710KL, "10 kOhms ±5% 1/4W 1206 Thick Film Resistor", Manufacturer=Yageo, Package=1206, Power Rating=0.25W, Supplier Part Number 1=311-10KERTR-ND, Temperature Range="-55°C ~ 155°C", Temperature Stability=±100ppm/°C, Tolerance=±5%, Voltage=200V, Ajax_1C_ID=29423, Ajax_1C_PN="10k 5% 1206 Resistors SMD RoHS", Ajax_1С_Status="RND Only", Component Status=Released, Component Type=SMD, ComponentLink1Description=Datasheet, ComponentLink1URL=https://eu.mouser.com/datasheet/2/447/PYu_RC_Group_51_RoHS_L_11-1984063.pdf, GUID_1C=e3e7c694-a8f0-11eb-ab74-0050569f2651, Part Number=RC1206JR-0710KL, Part Type="Thick Film", Price=0,0018, Replacement=NONE, Supplier 1=Digi-Key
R16 R17: library part 3296W-1-103LF, "10 kOhms ±10% Trimmer Resistor, 0.5W, Through Hole 3/8\", 4.83x9.53mm, 10.03mm Height", Manufacturer=Bourns, Package=4.83x9.53mm, Power Rating=0.5W, Supplier Part Number 1=652-3296W-1-103LF, Temperature Range="-55°C ~ 125°C", Temperature Stability=±100ppm/°C, Tolerance=±10%, Ajax_1C_PN=NONE, Ajax_1С_Status="RND Only", Component Status="On Review", Component Type=PTH, ComponentLink1Description=Datasheet, ComponentLink1URL=https://www.bourns.com/data/global/pdfs/3296.pdf, Part Number=3296W-1-103LF, Part Type="Trimming Potentiometer", Price=NONE, Replacement=NONE, Supplier 1=Mouser
R20: library part FKN2WSJT-73-22R, "68 Ohm ±5%, 2W d4.6mm L11.5mm Axial Through Hole, Fusible, Flameproof, Wirewound Resistor", Manufacturer=Yageo, Package="Axial 4.6mm, L11.5mm", Power Rating=2W, Supplier Part Number 1=603-FKN2WSJT-73-22R, Temperature Range="-40°C ~ 155°C", Temperature Stability=±350ppm/°C, Tolerance=±5%, Ajax_1C_ID=55873, Ajax_1C_PN="22R 5% 2W FKN2WSJT-73-22R YAGEO резистор выводной", Ajax_1С_Status="RND Only", Component Status=Released, Component Type=PTH, ComponentLink1Description=Datasheet, ComponentLink1URL=https://www.yageo.com/upload/media/product/productsearch/datasheet/lr/YAGEO%20FKN_datasheet_2021v0.pdf, GUID_1C=1e7de5d6-6f01-11ed-a366-005056994834, Part Number=FKN2WSJT-73-22R, Part Type=Wirewound, Price=0,2524, Replacement=NONE, Supplier 1=Mouser
R21 R22: library part FKN2WSJT-73-22R, "100 Ohm ±5%, 2W d4.6mm L11.5mm Axial Through Hole, Fusible, Flameproof, Wirewound Resistor", Manufacturer=Yageo, Package="Axial 4.6mm, L11.5mm", Power Rating=2W, Supplier Part Number 1=603-FKN2WSJT-73-22R, Temperature Range="-40°C ~ 155°C", Temperature Stability=±350ppm/°C, Tolerance=±5%, Ajax_1C_ID=55873, Ajax_1C_PN="22R 5% 2W FKN2WSJT-73-22R YAGEO резистор выводной", Ajax_1С_Status="RND Only", Component Status=Released, Component Type=PTH, ComponentLink1Description=Datasheet, ComponentLink1URL=https://www.yageo.com/upload/media/product/productsearch/datasheet/lr/YAGEO%20FKN_datasheet_2021v0.pdf, GUID_1C=1e7de5d6-6f01-11ed-a366-005056994834, Part Number=FKN2WSJT-73-22R, Part Type=Wirewound, Price=0,2524, Replacement=NONE, Supplier 1=Mouser
TP2 TP3 TP4 TP5 TP6 TP7 TP8 TP9: "1.75mm Pad for Plug-In or Receptacle", Manufacturer=NONE, Ajax_1C_PN=NONE, Ajax_1С_Status="RND Only", Component Status=Released, Component Type=PTH, ComponentLink1Description=Datasheet, ComponentLink1URL=NONE, Part Number=PAD-1.75mm, Part Type=Pad, Price=NONE, Replacement=NONE, Temperature Range=NONE
TR1: library part Amidon_43-3312, Manufacturer=Handmade, Part Number="Amidon 43-3312", Saturation Current=11.3A, Tolerance=±20%, ComponentLink1Description=Datasheet, ComponentLink1URL=https://www.vishay.com/docs/34193/ihlp-4040dz-01.pdf
TR2: library part Amidon_43-202, Manufacturer=Handmade, Part Number="Amidon 43-202", Saturation Current=11.3A, Tolerance=±20%, ComponentLink1Description=Datasheet, ComponentLink1URL=https://www.vishay.com/docs/34193/ihlp-4040dz-01.pdf
VD1 VD2 VD3 VD4 VD5 VD7 VD9: "Fast Switching Diode, 100V 200 mA, SOD-80C", Current=200mA, Manufacturer=Suntan, Package=SOD-80, Temperature Range="-65°C ~ 175°C", Voltage=100V, Component Status=Released, Component Type=SMD, ComponentLink1Description=Datasheet, Marking=NONE, Part Number=LL4148, Part Type="Fast Switching", Price=0.02625203, Replacement=NONE, Standard Lead Time=NONE, Vf="1V @ 10mA"
VD6 VD8: library part SMAZ30-13-F, "Zener Diode 15V, 1W, ±5%, SMA", Manufacturer="Diodes Incorporated", Package=SMA, Supplier Part Number 1=621-SMAZ30-F, Temperature Range="-65°C ~ 150°C", Voltage=15V, Component Status=Released, Component Type=SMD, ComponentLink1Description=Datasheet, Marking=ZJQ, Part Number=SMAJ15CA, Part Type=Zener, Price=0.144, Replacement=NONE, Standard Lead Time="18 Weeks", Supplier 1=Mouser
VD10: library part 1.5SMB47CA, "TVS Diode 18V Clamp, 23.5A (10/1000us) Ipp, SMB", Current=23.5A, Manufacturer=Littelfuse, Package=SMB, Supplier Part Number 1=18-1.5SMB47CATR-ND, Temperature Range="-65°C ~ 150°C", Voltage=18V, Component Status=Released, Component Type=SMD, ComponentLink1Description=Datasheet, Marking=C15F, Part Number=SM6T18A, Part Type="TVS / ESD Protection", Price=0.24614587, Replacement=NONE, Standard Lead Time="16 Weeks", Supplier 1=Digi-Key
VD11: "Zener Diode 18V, 500mW, ±5%, SOD-123", Manufacturer=Onsemi, Package=SOD-123, Supplier Part Number 1=MMSZ5248BT1GOSTR-ND, Temperature Range="-55°C ~ 150°C", Voltage=18V, Component Status=Released, Component Type=SMD, ComponentLink1Description=Datasheet, Marking=J3, Part Number=MMSZ5248BT1G, Part Type=Zener, Price=0.065, Replacement=NONE, Standard Lead Time="14 Weeks", Supplier 1=Digi-Key
VT1 VT2 VT3 VT4: library part N-CH_MOSFET, "N-MOSFET; полевой;", Package=D-PAK, Component Type=SMD, ComponentLink1Description=Datasheet, ComponentLink1URL=https://www.tme.eu/Document/dd9e9fcbccf7c5b1f5f9da06cbc5bf44/AOD403-DTE.pdf, Part Number=IRLZ24N, Part Type=N-Channel
VT5: library part BC807-40,215, "-45V, -500mA PNP General Purpose Transistor", Manufacturer="Nexperia USA", Package=SOT-23, Supplier Part Number 1=771-BC807-40-T/R, Temperature Range="-65°C ~ 150°C", Component Status=Released, Component Type=SMD, ComponentLink1Description=Datasheet, ComponentLink1URL=https://assets.nexperia.com/documents/data-sheet/BC807_BC807W_BC327.pdf, Ic=500mA, Part Number=BC807-40,215, Part Type=PNP, Price=0.0094197, Replacement=NONE, Standard Lead Time="4 Weeks", Supplier 1=Mouser, Vce=45V
VT6: library part AOD4189, "-30V, 70A max P-Channel Power MOSFET, 8mOhm @ Vgs = 20V", Manufacturer="Alpha & Omega Semiconductor Inc.", Package=D-Pak, Supplier Part Number 1=785-1351-2-ND, Temperature Range="-55°C ~ 175°C", Component Status=Review, Component Type=SMD, ComponentLink1Description=Datasheet, ComponentLink1URL=https://www.aosmd.com/sites/default/files/res/datasheets/AOD4189.pdf, Id=70A, Part Number=AOD403, Part Type=P-Channel, Price=NONE, Rds=8mOhm, Replacement=NONE, Standard Lead Time="16 Weeks", Supplier 1=Digi-Key, Vds=30V
VT7: library part IRLML0100TRPBF, "100V, 1.6A max N-Channel HEXFET Power MOSFET, 190mOhm @ Vgs = 4.5V", Manufacturer="Infineon Technologies", Package=SOT-23, Supplier Part Number 1=IRLML0100TRPBFTR-ND, Temperature Range="-55°C ~ 150°C", Component Status=Released, Component Type=SMD, ComponentLink1Description=Datasheet, ComponentLink1URL=https://www.infineon.com/dgdl/irlml0100pbf.pdf?fileId=5546d462533600a4015356649d9225e8, Id=1.6A, Part Number=IRLML0100TRPBF, Part Type=N-Channel, Price=0.071, Rds=220mOhm, Replacement=NONE, Standard Lead Time="13 Weeks", Supplier 1=Digi-Key, Vds=100V
X1 X2: "50Ohm SMA Connector, Right Angle, Female, 5.1mm", Manufacturer="Wangshen Development LLC", Temperature Range="-55°C ~ 155°C", Component Type=PTH, ComponentLink1Description=Datasheet, Part Number=WSD-SMAKWE-14.5, Part Type="RF Connector", Price=NONE, Replacement=NONE
X3: library part CI3102P1H00, "WH Series 2.54mm Wire to Board Right Angle DIP Type Headers, 2 Pin", Manufacturer=CviLux, Part Number=0B_TX, Temperature Range="-25℃ ~ 85℃", Component Type=PTH, ComponentLink1Description=Datasheet, Part Type="Wire-to-Board / Header", Price=0.017, Replacement=NONE
X4: "2 Pin DC Power Socket, XT30, Male, THT, Right Angle, Yellow, 15A, 500V", Manufacturer=Amass, Temperature Range="-20°C ~ 120°C", Component Type=PTH, ComponentLink1Description=Datasheet, Part Number=XT30PW-M, Part Type="Power Socket", Price=0.37753379, Replacement=NONE, Supplier 1=TME, Supplier Part Number 1=XT30PW-M
X5: library part CI3103P1V00, "WH Series 2.54mm Wire to Board Straight DIP Type Headers, 3 Pin", Manufacturer=CviLux, Temperature Range="-25℃ ~ 85℃", Component Type=PTH, ComponentLink1Description=Datasheet, Part Number=CI3103P1V00, Part Type="Wire-to-Board / Header", Price=0.04922256, Replacement=NONE
X6: library part CI3102P1H00, "WH Series 2.54mm Wire to Board Right Angle DIP Type Headers, 2 Pin", Manufacturer=CviLux, Part Number=TX_LED, Temperature Range="-25℃ ~ 85℃", Component Type=PTH, ComponentLink1Description=Datasheet, Part Type="Wire-to-Board / Header", Price=0.017, Replacement=NONE
X7: library part CI3102P1H00, "WH Series 2.54mm Wire to Board Right Angle DIP Type Headers, 2 Pin", Manufacturer=CviLux, Part Number=ВЕНТИЛЯТОР, Temperature Range="-25℃ ~ 85℃", Component Type=PTH, ComponentLink1Description=Datasheet, Part Type="Wire-to-Board / Header", Price=0.017, Replacement=NONE
X8: library part CI3102P1H00, "WH Series 2.54mm Wire to Board Right Angle DIP Type Headers, 2 Pin", Manufacturer=CviLux, Part Number=ТЕРМОСТАТ, Temperature Range="-25℃ ~ 85℃", Component Type=PTH, ComponentLink1Description=Datasheet, Part Type="Wire-to-Board / Header", Price=0.017, Replacement=NONE

## Free pads (board coordinates)
  round 7 hole 3.2: 5(4,4) 5(4,88) 5(74,4) 5(74,88) 5(146,4) 5(146,88)
  round 7 hole 6.8: 6(57.016,39.78) 6(57.016,52.159) 6(57.023,27.889) 6(57.023,64)

## Via types
v1: diameter 0.6, hole 0.3, TOP to BOT, tented both sides, 868 vias
v2: diameter 1.27, hole 0.711, TOP to BOT, tented both sides, 15 vias

## Nets (pads, with @x,y where several pads share a name; then routed paths per layer and width w, separated by ;. In a path a pad name is that pad's centre, name@x,y a point inside that pad or via, vN(x,y) a via of type N, cw(c..) or ccw(c..) an arc to the next point about the centre after c; other vN are vias at no path point)
+5V: C22.1 C24.1 DA1.2 DA1.4 R12.1 R25.2 TP4.1 | length 23
  TOP w1: R12.1@60.452,74.543 62.478,74.543 63.5,75.565 63.5,77.724 64.516,78.74 C24.1@67.056,78.74 ; R25.2@67.056,81.788 C24.1@67.056,78.74 ; TP4.1@70.993,78.74 C24.1@67.056,78.74 ; DA1.4@77.826,78.74 DA1.2@84.226,78.74
+12V_IN: C15.2 C16.1 L1.1 R14.2 R27.1 TP6.1 VD11.CA VT5.2 VT6.3 X7.1 | length 109.5
  TOP w1: X7.1@14.097,70.993 15.748,72.644 26.67,72.644 29.343,75.317 R14.2@29.343,77.724 ; VT5.2@28.443,80.645 28.443,78.872 R14.2@29.343,77.972 ; R14.2@29.343,77.984 31.877,80.518 v2(52.705,80.518) ; v2(52.705,73.152) 94.825,73.152 L1.1@104.1,82.427
  BOT w1: v2(52.705,73.152) v2(52.705,80.518)